# EAGLE board gorrazoptere_v0_92 (EAGLE 4.16)
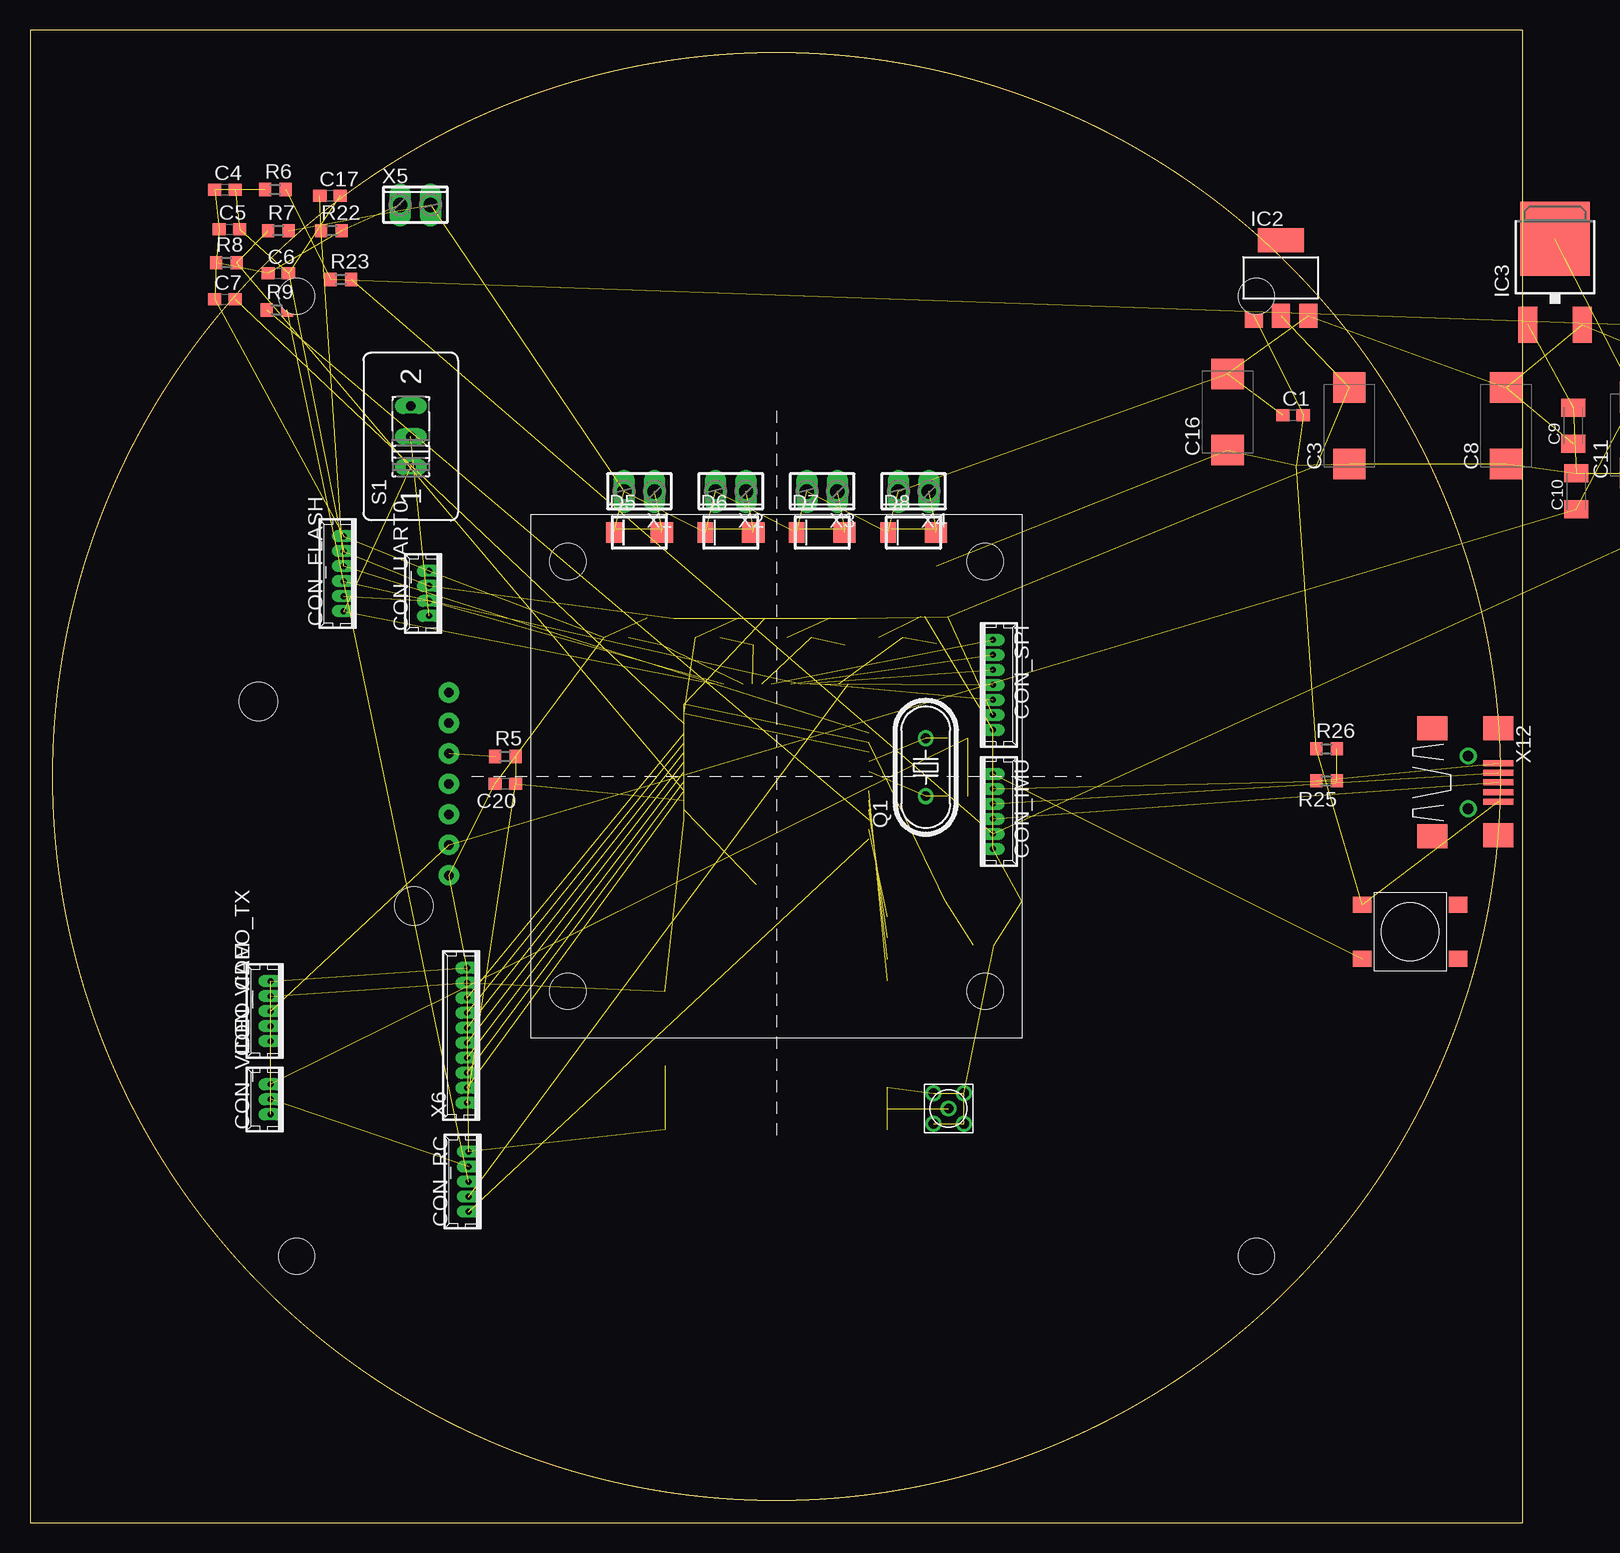
[diagram p0: board, top side]
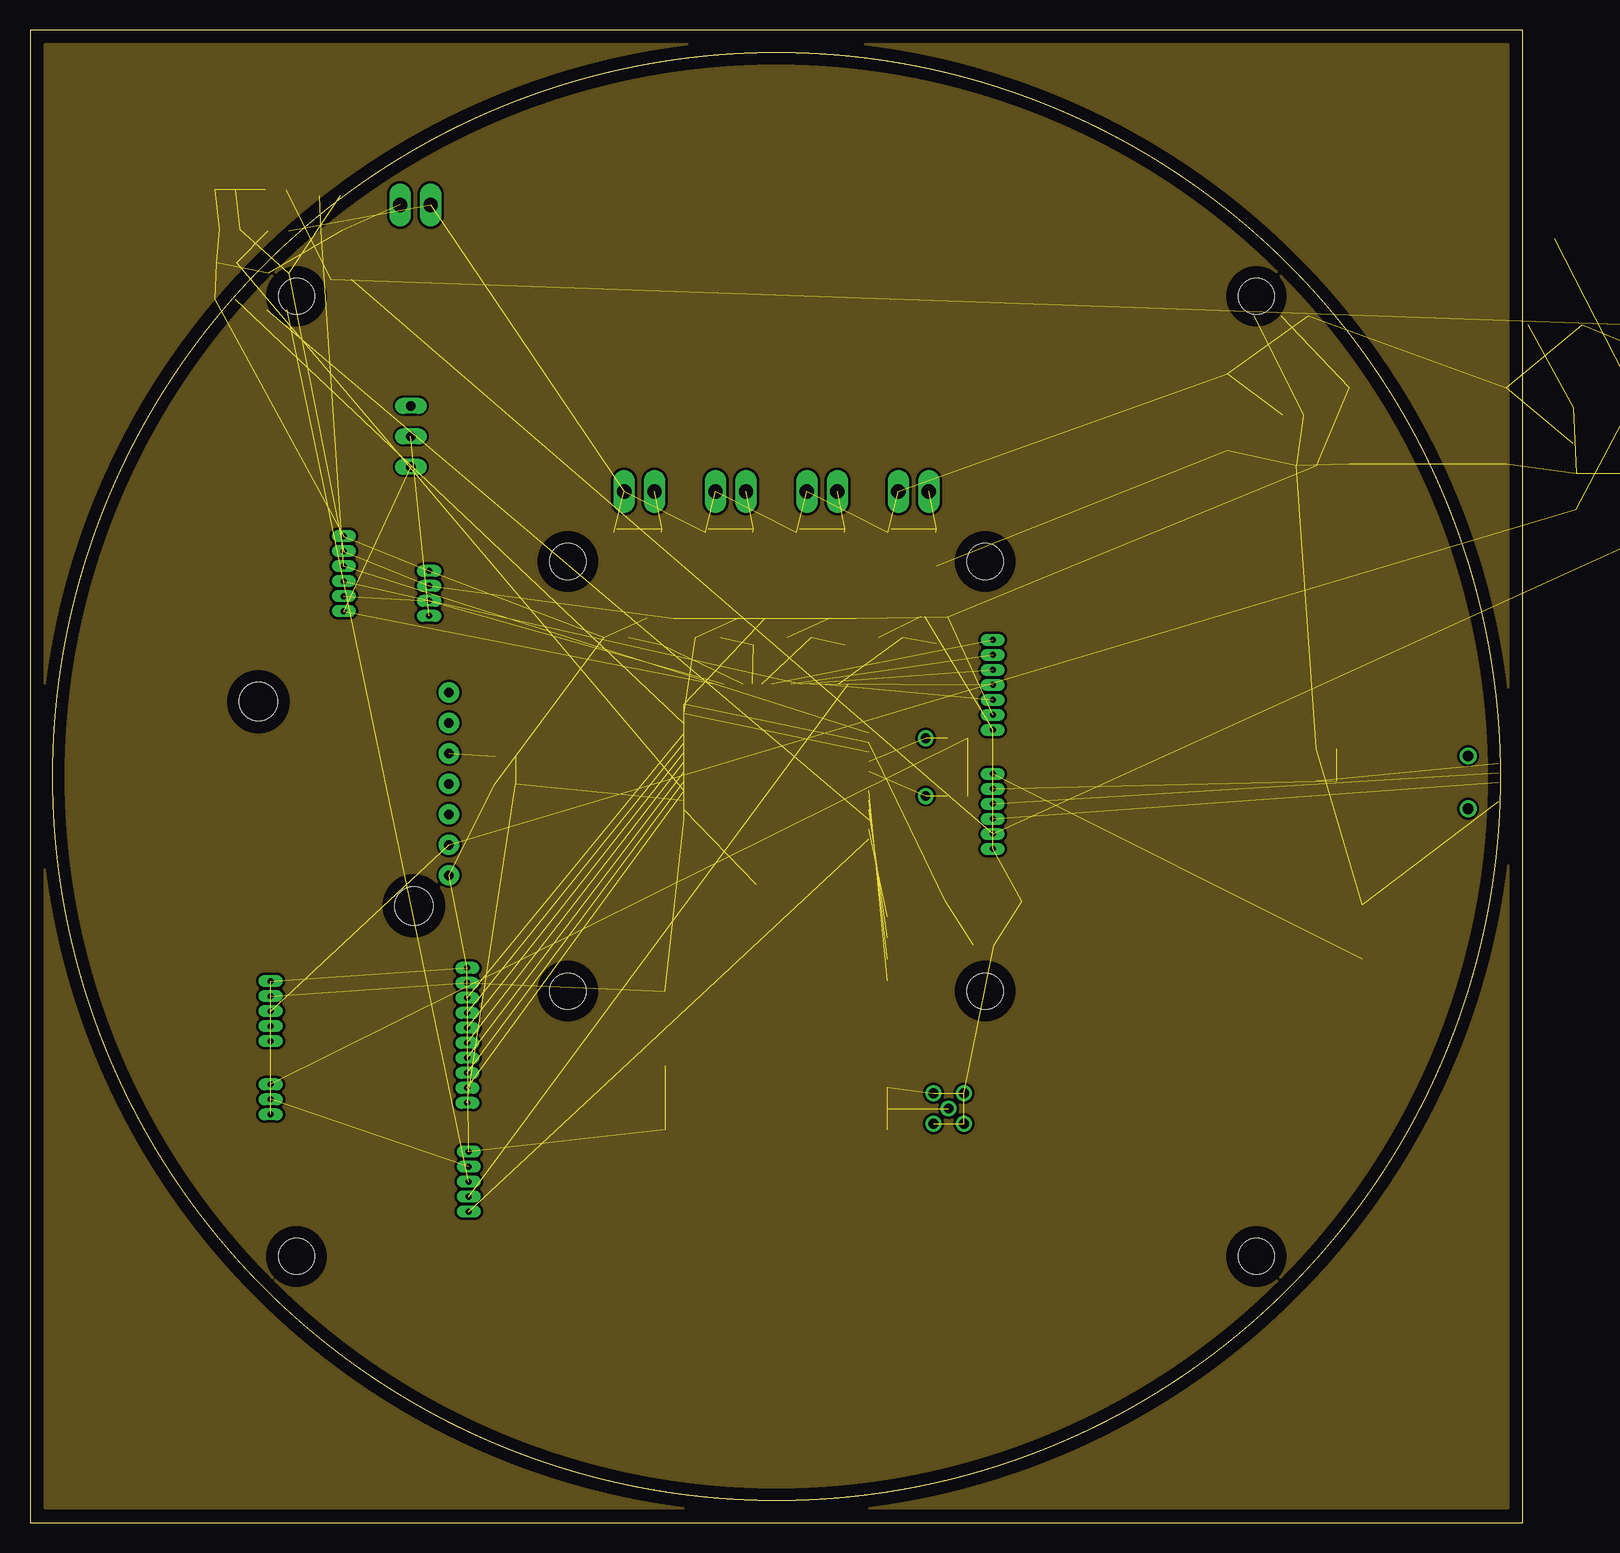
[diagram p1: board, inner layer Route2]
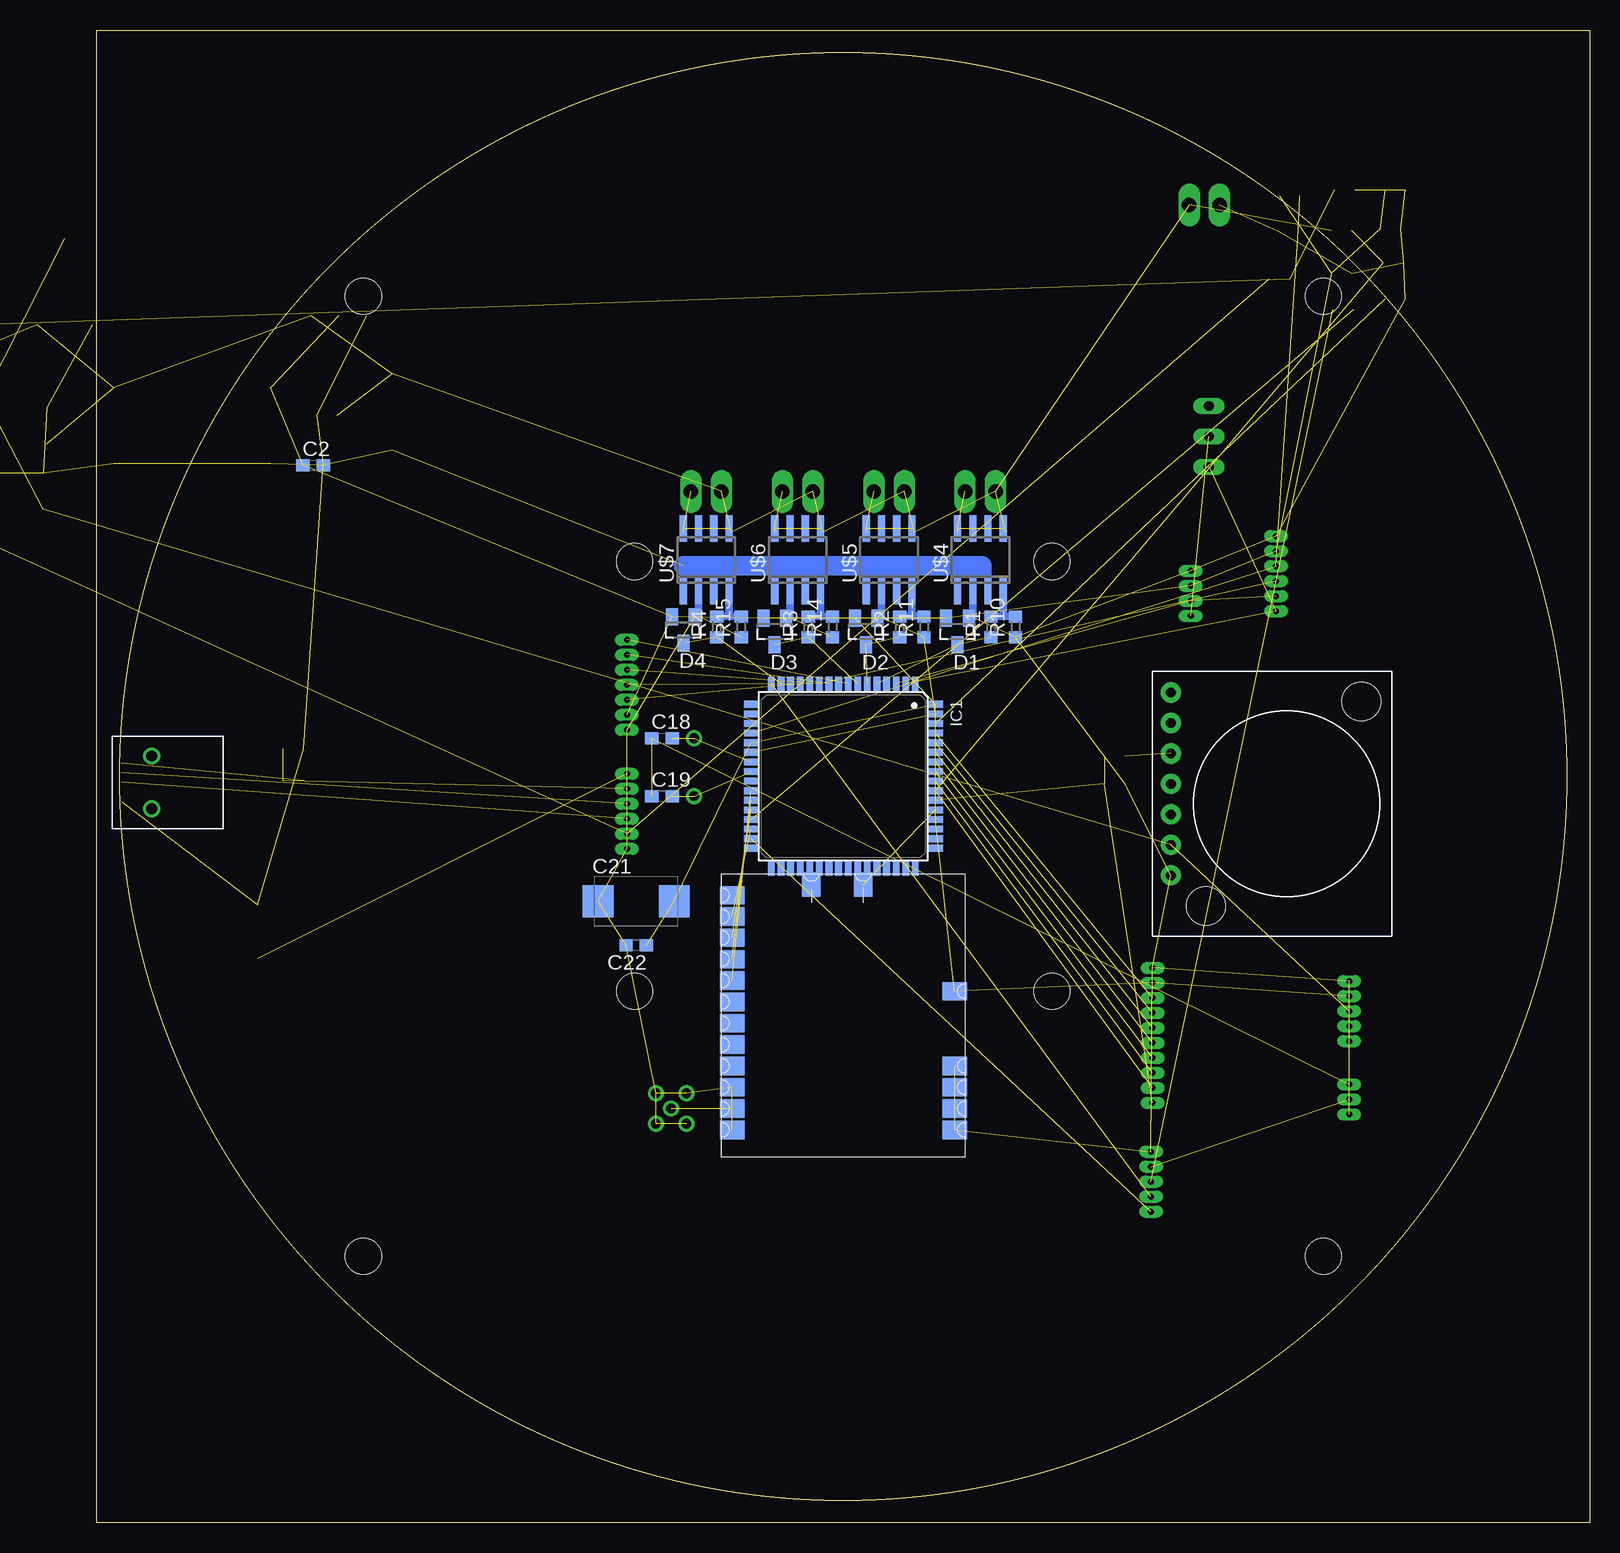
[diagram p2: board, bottom side, seen from below]

Size 124.44 x 124.38 mm. Coordinates in mm from the lower left corner, seen from the top.
Outline: 0,0 124.44,0 124.44,124.38 0,124.38 0,0
Outline: circle at 62.22,62.19 radius 60.33
Copper layers (1*16): Top 0.035mm / dielectric 1.5mm / Bottom 0.035mm
Design rules "default": minimum track width 10mil, minimum drill 24mil, track to track 8mil, track to pad 8mil, pad to pad 8mil, via to via 8mil, smd to smd 8mil, copper to edge 40mil, drill to drill 8mil, minimum pad ring 10mil, minimum via ring 8mil, stop-mask expansion 4mil, vias tented up to drill 0mil, thermal gap 10mil
Holes 3 mm at 44.83,80.1 79.62,80.1 79.62,44.28 44.83,44.28 22.22,102.2 102.23,102.2 22.22,22.19 102.23,22.19

## Footprints (pad centres in the part's own frame; a part is rotated, then mirrored left to right if it is on the bottom)
C0603 = smd 1.1 x 1: 1 -0.85,0; 2 0.85,0
D/7343-31R = smd 2.55 x 2.7: + 3.175,0; - -3.175,0
C1206K = smd 1.5 x 2: 1 -1.5,0; 2 1.5,0
53047-06 = drill 0.5 pad 0.698 long: 1 3.125,0; 2 1.875,0; 3 0.625,0; 4 -0.625,0; 5 -1.875,0; 6 -3.125,0
53047-05 = drill 0.5 pad 0.698 long: 1 2.5,0; 2 1.25,0; 3 0,0; 4 -1.25,0; 5 -2.5,0
53047-07 = drill 0.5 pad 0.698 long: 1 3.75,0; 2 2.5,0; 3 1.25,0; 4 0,0; 5 -1.25,0; 6 -2.5,0; 7 -3.75,0
53047-04 = drill 0.5 pad 0.698 long: 1 1.875,0; 2 0.625,0; 3 -0.625,0; 4 -1.875,0
53047-03 = drill 0.5 pad 0.698 long: 1 1.25,0; 2 0,0; 3 -1.25,0
SOT23 = smd 1 x 1.4: 1 -0.95,-1.1; 2 0.95,-1.1; 3 0,1.1
DO-214BA = smd 1.85 x 1.68: A 1.87,0 | smd 1.32 x 1.68: C -2.12,0
TQFP64-AEB = smd 1.194 x 0.559: 1 -7.7,6; 2 -7.7,5.2; 3 -7.7,4.4; 4 -7.7,3.6; 5 -7.7,2.8; 6 -7.7,2; 7 -7.7,1.2; 8 -7.7,0.4; 9 -7.7,-0.4; 10 -7.7,-1.2; 11 -7.7,-2; 12 -7.7,-2.8; 13 -7.7,-3.6; 14 -7.7,-4.4; 15 -7.7,-5.2; 16 -7.7,-6; 33 7.7,-6; 34 7.7,-5.2; 35 7.7,-4.4; 36 7.7,-3.6; 37 7.7,-2.8; 38 7.7,-2; 39 7.7,-1.2; 40 7.7,-0.4; 41 7.7,0.4; 42 7.7,1.2; 43 7.7,2; 44 7.7,2.8; 45 7.7,3.6; 46 7.7,4.4; 47 7.7,5.2; 48 7.7,6 | smd 0.559 x 1.194: 17 -6,-7.7; 18 -5.2,-7.7; 19 -4.4,-7.7; 20 -3.6,-7.7; 21 -2.8,-7.7; 22 -2,-7.7; 23 -1.2,-7.7; 24 -0.4,-7.7; 25 0.4,-7.7; 26 1.2,-7.7; 27 2,-7.7; 28 2.8,-7.7; 29 3.6,-7.7; 30 4.4,-7.7; 31 5.2,-7.7; 32 6,-7.7; 49 6,7.7; 50 5.2,7.7; 51 4.4,7.7; 52 3.6,7.7; 53 2.8,7.7; 54 2,7.7; 55 1.2,7.7; 56 0.4,7.7; 57 -0.4,7.7; 58 -1.2,7.7; 59 -2,7.7; 60 -2.8,7.7; 61 -3.6,7.7; 62 -4.4,7.7; 63 -5.2,7.7; 64 -6,7.7
SOT223 = smd 1.499 x 2.007: 1 -2.261,-3.15; 2 0.025,-3.15; 3 2.311,-3.15 | smd 3.81 x 2.007: 4 0,3.15
DPACK = smd 1.6 x 3: 1 -2.28,-4.8; 3 2.28,-4.8 | smd 5.8 x 6.2: 4 0,2.38
HC49U70 = drill 0.813 round: 1 -2.413,0; 2 2.413,0
R0603 = smd 1 x 1.1: 1 -0.85,0; 2 0.85,0
M251 = drill 0.813 long: 1 -2.54,0; 2 0,0; 3 2.54,0
B3S = smd 1.55 x 1.3: P$1 4,-2.25; P$2 -4,-2.25; P$3 4,2.25; P$4 -4,2.25
WI_232_DTS = smd 2.032 x 1.524: P$1 -10.668,1.651; P$2 -10.668,-2.667 | smd 1.524 x 2.032: P$3 -9.779,-9.271; P$4 -8.001,-9.271; P$5 -6.223,-9.271; P$6 -4.445,-9.271; P$7 -2.667,-9.271; P$8 -0.889,-9.271; P$9 0.889,-9.271; P$10 2.667,-9.271; P$11 4.445,-9.271; P$12 6.223,-9.271; P$13 8.001,-9.271; P$14 9.779,-9.271; P$15 9.779,9.271; P$16 8.001,9.271; P$17 6.223,9.271; P$18 4.445,9.271; P$19 -1.778,9.271
SO08 = smd 0.6 x 2.2: 1 -1.905,-2.6; 2 -0.635,-2.6; 3 0.635,-2.6; 4 1.905,-2.6; 5 1.905,2.6; 6 0.635,2.6; 7 -0.635,2.6; 8 -1.905,2.6
CON_MMCX = drill 0.813 round: P$1 1.27,1.27; P$2 -1.27,1.27; P$3 -1.27,-1.27; P$4 1.27,-1.27; P$5 0,0
MAXSONAR = drill 0.8 pad 1.676 round: P$1 18.415,1.778; P$2 18.415,4.318; P$3 18.415,6.858; P$4 18.415,9.398; P$5 18.415,11.938; P$6 18.415,14.478; P$7 18.415,17.018 | hole 3.2: 2.54,2.54; 15.494,19.558
2POL254 = drill 1.2 long: 1 -1.27,0; 2 1.27,0
53047-10 = drill 0.5 pad 0.698 long: 1 5.625,0; 2 4.375,0; 3 3.125,0; 4 1.875,0; 5 0.625,0; 6 -0.625,0; 7 -1.875,0; 8 -3.125,0; 9 -4.375,0; 10 -5.625,0
USB-MB-S = smd 2.5 x 0.5: D+ 2.5,0; D- 2.5,0.8; GND 2.5,-1.6; ID 2.5,-0.8; VBUS 2.5,1.6 | smd 2.5 x 2: P$1 -3,-4.5; P$2 -3,4.5; P$3 2.5,-4.4; P$4 2.5,4.5 | drill 0.9 round: P$5 0,2.2; P$6 0,-2.2

## Placement (x,y rotation side)
C1  100nF  [C0603]  105.28,92.29 0 top
C2  100nF  [C0603]  106.42,88.1 0 bottom
C3  22uF  [D/7343-31R]  109.98,91.4 90 top
C4  [C0603]  16.25,111.09 0 top
C5  [C0603]  16.63,107.78 0 top
C6  [C0603]  20.7,104.1 0 top
C7  100nF  [C0603]  16.25,101.94 0 top
C8  22uF  [D/7343-31R]  123.06,91.4 90 top
C9  100nF  [C1206K]  128.65,91.4 90 top  (outside the outline)
C10  100nF  [C1206K]  128.9,85.94 90 top  (outside the outline)
C11  22uF  [D/7343-31R]  133.85,90.64 90 top  (outside the outline)
C12  22uF  [D/7343-31R]  144.01,90.64 90 top  (outside the outline)
C13  100nF  [C0603]  148.97,91.66 270 top  (outside the outline)
C14  100nF  [C0603]  148.84,87.72 270 top  (outside the outline)
C15  22uF  [D/7343-31R]  154.05,90 90 top  (outside the outline)
C16  22uF  [D/7343-31R]  99.82,92.55 90 top
C17  [C0603]  25.01,110.58 0 top
C18  22pF  [C0603]  77.34,65.37 0 bottom
C19  22pF  [C0603]  77.34,60.54 0 bottom
C20  100nF  [C0603]  39.62,61.56 180 top
C21  22uF  [D/7343-31R]  79.5,51.78 0 bottom
C22  100nF  [C0603]  79.5,48.09 180 bottom
CON_FLASH  [53047-06]  26.16,79.08 90 top
CON_IMU  [53047-06]  80.26,59.27 270 top
CON_RC  [53047-05]  36.57,28.41 90 top
CON_SPI  [53047-07]  80.26,69.81 270 top
CON_UART0  [53047-04]  33.27,77.43 90 top
CON_VIDEO_CAM  [53047-03]  20.06,35.27 90 top
CON_VIDEO_TX  [53047-05]  20.06,42.63 90 top
D1  BAV199  [SOT23]  52.7,74.26 180 bottom
D2  BAV199  [SOT23]  60.32,74.26 180 bottom
D3  BAV199  [SOT23]  67.94,74.26 180 bottom
D4  BAV199  [SOT23]  75.56,74.38 180 bottom
D5  [DO-214BA]  50.79,82.51 0 top
D6  [DO-214BA]  58.41,82.51 0 top
D7  [DO-214BA]  66.03,82.51 0 top
D8  [DO-214BA]  73.66,82.51 0 top
IC1  MEGA128-A  [TQFP64-AEB]  62.22,62.19 270 bottom
IC2  REG1117  [SOT223]  104.26,103.72 0 top
IC3  LM317MABDT  [DPACK]  127.12,104.61 0 top
IC4  LM317MABDT  [DPACK]  146.93,104.23 0 top  (outside the outline)
Q1  [HC49U70]  74.67,62.95 90 top
R1  100R  [R0603]  49.91,74.64 90 bottom
R2  100R  [R0603]  57.53,74.64 90 bottom
R3  100R  [R0603]  65.15,74.64 90 bottom
R4  100R  [R0603]  72.77,74.64 90 bottom
R5  1K  [R0603]  39.62,63.84 0 top
R6  10K  [R0603]  20.44,111.09 0 top
R7  10K  [R0603]  20.7,107.66 0 top
R8  10K  [R0603]  16.38,104.99 0 top
R9  100R  [R0603]  20.57,101.05 0 top
R10  10K  [R0603]  47.87,74.64 90 bottom
R11  10K  [R0603]  55.49,74.64 90 bottom
R14  10K  [R0603]  63.11,74.64 90 bottom
R15  10K  [R0603]  70.73,74.64 90 bottom
R22  1K  [R0603]  25.14,107.66 0 top
R23  10K  [R0603]  25.9,103.59 0 top
R25  3.3K  [R0603]  108.07,61.81 180 top
R26  4.7K  [R0603]  108.07,64.48 0 top
S1  [M251]  31.75,90.51 90 top
U$1  B3S  [B3S]  115.06,49.24 0 top
U$3  WI232  [WI_232_DTS]  62.22,42.51 270 bottom
U$4  IRF7809  [SO08]  50.79,80.23 0 bottom
U$5  IRF7809  [SO08]  58.41,80.23 0 bottom
U$6  IRF7809  [SO08]  66.03,80.23 0 bottom
U$7  IRF7809  [SO08]  73.66,80.23 0 bottom
U$8  CON_MMCX  [CON_MMCX]  76.58,34.51 0 top
U$9  MAXSONAR  [MAXSONAR]  16.5,70.95 180 bottom
X1  [2POL254]  50.79,85.94 180 top
X2  [2POL254]  58.41,85.94 180 top
X3  [2POL254]  66.03,85.94 180 top
X4  [2POL254]  73.66,85.94 180 top
X5  [2POL254]  32.13,109.82 0 top
X6  [53047-10]  36.44,40.6 90 top
X12  USB-MB-S  [USB-MB-S]  119.88,61.68 0 top

## Library data of the parts
C1-C22 R1-R11 R14 R15 R22 R23 R25 R26 = rcl
CON_FLASH CON_IMU CON_RC CON_SPI CON_UART0 CON_VIDEO_CAM CON_VIDEO_TX X6 = con-molex
D1-D8 = diode
IC1 = atmel
IC2 = burr-brown
IC3 IC4 = v-reg
Q1 = crystal
S1 = switch
U$1 U$3-U$9 = paparazzi
X1-X5 = con-phoenix-254
X12 = con-usb

## Nets
4017_RESET: CON_RC.5 IC1.31
+3V3: C2.1 C3.+ C4.2 C5.2 C6.2 C17.2 C21.+ C22.1 CON_FLASH.2 CON_SPI.2 CON_UART0.2 CON_VIDEO_TX.2 D1.2 D2.2 D3.2 D4.2 IC1.21 IC1.52 IC1.64 IC2.2 U$3.P$19 X6.2
+5V: C10.1 C11.+ CON_RC.2 CON_VIDEO_CAM.2 CON_VIDEO_TX.3 IC3.4 U$9.P$6
+6V5: C14.1 C15.+ CON_IMU.2 IC4.4 R23.2
ADC0: IC1.61 X6.3
ADC1: IC1.60 X6.4
ADC2: IC1.59 X6.5
ADC3: IC1.58 X6.6
ADC4: IC1.57 X6.7
ADC5: IC1.56 X6.8
ADC6: IC1.55 R7.1 R8.2 X6.9
ADC7: C20.1 IC1.54 R5.2 X6.10
AUDIO: CON_VIDEO_TX.4
CMD: IC1.30 U$3.P$4
CTS: IC1.26 U$3.P$7
GND: C1.2 C2.2 C3.- C4.1 C5.1 C6.1 C7.1 C8.- C9.2 C10.2 C11.- C12.- C13.2 C14.2 C15.- C16.- C18.1 C19.1 C20.2 C21.- C22.2 CON_FLASH.1 CON_IMU.1 CON_RC.1 CON_SPI.1 CON_UART0.1 CON_VIDEO_CAM.1 CON_VIDEO_TX.1 D1.1 D2.1 D3.1 D4.1 IC1.22 IC1.53 IC1.63 IC2.1 IC3.1 R6.1 R8.1 R10.1 R11.1 R14.1 R15.1 R22.2 R26.1 U$1.P$4 U$3.P$1 U$3.P$12 U$3.P$14 U$3.P$15 U$3.P$16 U$3.P$17 U$3.P$18 U$4.1 U$4.2 U$4.3 U$5.1 U$5.2 U$5.3 U$6.1 U$6.2 U$6.3 U$7.1 U$7.2 U$7.3 U$8.P$1 U$8.P$2 U$8.P$3 U$8.P$4 U$9.P$7 X5.1 X6.1 X12.GND
MISO: CON_SPI.3 IC1.13
MOSI: CON_SPI.4 IC1.12
N$3: C18.2 IC1.23 Q1.2
N$4: C19.2 IC1.24 Q1.1
N$6: U$3.P$13 U$8.P$5
N$7: CON_RC.3 R9.2
N$8: CON_IMU.6 U$1.P$2
N$9: R1.2 R10.2 U$4.4
N$13: D5.A U$4.5 U$4.6 U$4.7 U$4.8 X1.1
N$14: D6.A U$5.5 U$5.6 U$5.7 U$5.8 X2.1
N$15: D7.A U$6.5 U$6.6 U$6.7 U$6.8 X3.1
N$16: D8.A U$7.5 U$7.6 U$7.7 U$7.8 X4.1
N$19: R2.2 R11.2 U$5.4
N$20: R3.2 R14.2 U$6.4
N$21: R4.2 R15.2 U$7.4
N$23: C7.2 IC1.62
N$24: R25.2 X12.VBUS
N$25: CON_UART0.4 S1.2
N$26: IC4.1 R6.2 R23.1
N$36: R5.1 U$9.P$3
PDI: CON_FLASH.6 IC1.2 S1.1
PDO: CON_FLASH.5 CON_UART0.3 IC1.3
PPM_IN: IC1.29 R9.1
PPM_OUT1: CON_RC.4 IC1.16
PWM0: D1.3 IC1.5 R1.1
PWM1: D2.3 IC1.6 R2.1
PWM2: D3.3 IC1.7 R3.1
PWM3: D4.3 IC1.15 R4.1
RESET: C17.1 CON_FLASH.3 IC1.20 R22.1
RXD1: IC1.27 U$3.P$6
SCK: CON_FLASH.4 CON_SPI.5 IC1.11
SINT: CON_SPI.7 IC1.8
SS: CON_SPI.6 IC1.10
TXD1: IC1.28 U$3.P$5
USB+: CON_IMU.3 X12.D+
USB-: CON_IMU.4 X12.D-
USB_VBUS: CON_IMU.5 R25.1 R26.2
VBAT: C1.1 C8.+ C9.1 C12.+ C13.1 C16.+ D5.C D6.C D7.C D8.C IC2.3 IC3.3 IC4.3 R7.2 X1.2 X2.2 X3.2 X4.2 X5.2
VIDEO: CON_VIDEO_CAM.3 CON_VIDEO_TX.5

## Tracks (layer width: path | path; a pad name or v marks a point on that pad's centre or on a via)
4017_RESET  (1 unrouted)
+3V3  (21 unrouted)
+5V  (6 unrouted)
+6V5  (4 unrouted)
ADC0  (1 unrouted)
ADC1  (1 unrouted)
ADC2  (1 unrouted)
ADC3  (1 unrouted)
ADC4  (1 unrouted)
ADC5  (1 unrouted)
ADC6  (3 unrouted)
ADC7  (3 unrouted)
CMD  (1 unrouted)
CTS  (1 unrouted)
GND  (57 unrouted)
  Bottom 0.61: 50.67,79.72 50.16,79.72 U$4.3 | 51.43,79.72 U$4.2 51.43,75.4 51.75,75.4 | 52.7,79.72 U$4.1 | 57.78,79.72 U$5.3 | 59.05,79.72 U$5.2 59.05,75.4 59.37,75.4 | 60.32,79.72 U$5.1 | 65.4,79.72 U$6.3 | 66.67,79.72 U$6.2 66.67,75.4 66.99,75.4 | 67.94,79.72 U$6.1 | 73.02,79.72 U$7.3 | 74.29,79.72 U$7.2 74.29,75.53 74.61,75.53 | 75.56,79.72 U$7.1 | 51.75,75.4 51.81,75.4 | 51.75,75.4 D1.1 | 59.37,75.4 59.43,75.4 | 59.37,75.4 D2.1 | 66.99,75.4 67.05,75.4 | 66.99,75.4 D3.1 | 74.61,75.53 74.67,75.53 | 74.61,75.53 D4.1
  Bottom 1.626: 50.67,79.72 51.43,79.72 52.7,79.72 57.78,79.72 59.05,79.72 60.32,79.72 65.4,79.72 66.67,79.72 67.94,79.72 73.02,79.72 74.29,79.72 75.56,79.72
MISO  (1 unrouted)
MOSI  (1 unrouted)
N$1  (via drill 0.6)
  other vias: 22.22,102.2
N$2
  pour Route2: 1.27,123.15 123.19,123.15 123.19,1.23 1.27,1.23
N$3  (2 unrouted)
N$4  (2 unrouted)
N$6  (1 unrouted)
N$7  (1 unrouted)
N$8  (1 unrouted)
N$9
  Bottom 0.61: R10.2 47.87,75.53 48.89,75.53 | 48.89,75.53 U$4.4 | R1.2 49.91,75.53 48.89,75.53
N$13  (5 unrouted)
N$14  (5 unrouted)
N$15  (5 unrouted)
N$16  (5 unrouted)
N$19
  Bottom 0.61: R11.2 55.49,75.53 56.51,75.53 | 56.51,75.53 U$5.4 | R2.2 57.53,75.53 56.51,75.53
N$20
  Bottom 0.61: R14.2 63.11,75.53 64.13,75.53 | 64.13,75.53 U$6.4 | R3.2 65.15,75.53 64.13,75.53
N$21
  Bottom 0.61: R15.2 70.73,75.53 71.75,75.53 | 71.75,75.53 U$7.4 | R4.2 72.77,75.53 71.75,75.53
N$23  (1 unrouted)
N$24  (1 unrouted)
N$25  (1 unrouted)
N$26  (2 unrouted)
N$36  (1 unrouted)
PDI  (2 unrouted)
PDO  (2 unrouted)
PPM_IN  (1 unrouted)
PPM_OUT1  (1 unrouted)
PWM0  (2 unrouted)
PWM1  (2 unrouted)
PWM2  (2 unrouted)
PWM3  (2 unrouted)
RESET  (3 unrouted)
RXD1  (1 unrouted)
SCK  (2 unrouted)
SINT  (1 unrouted)
SS  (1 unrouted)
TXD1  (1 unrouted)
USB+  (1 unrouted)
USB-  (1 unrouted)
USB_VBUS  (2 unrouted)
VBAT  (18 unrouted)
VIDEO  (1 unrouted)